# Altium PCB EVB-A32S1-M_PCB1.PcbDoc (part 1 of 2)
Units mm, origin at the board's own origin, x right, y up, seen from the top; angles counter-clockwise.
Board outline 152.4 x 101.6 mm, 4 copper layers (L1 (Signal), L2 (GND), L3 (PWR), L4 (Signal)), stack 1.553 mm thick; 111 components, 86 nets, 392 pads, 0 vias.
Unrouted connection lines stored in the file: 269.
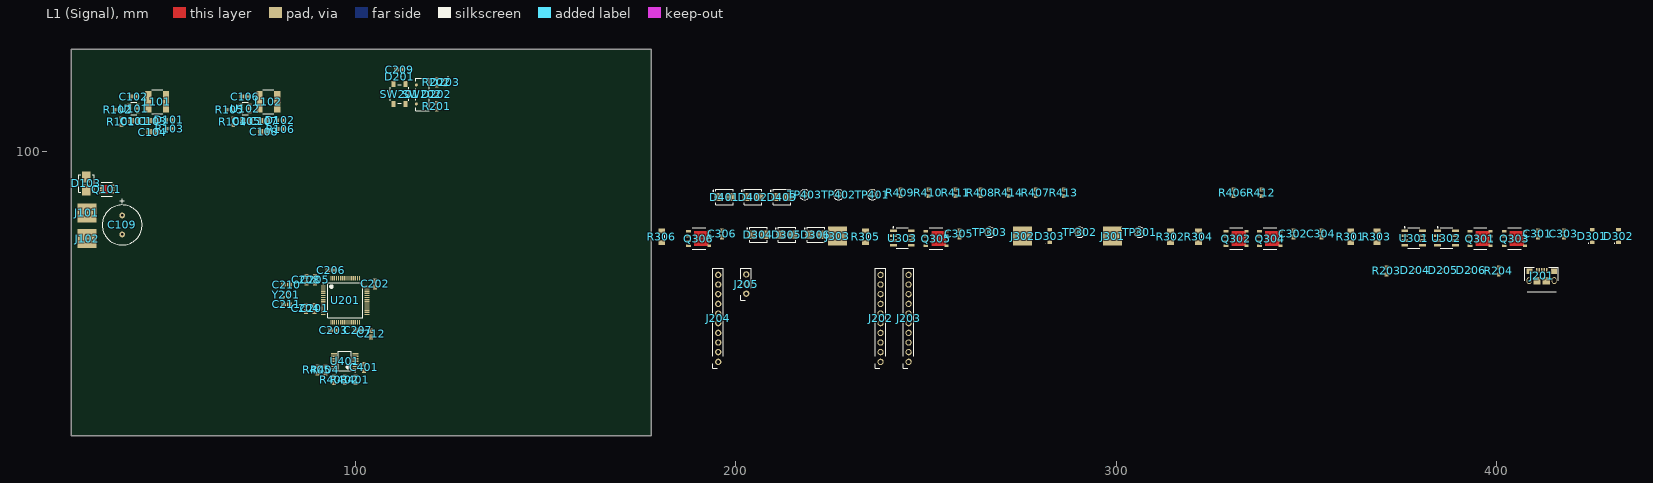
[diagram p0: L1 (Signal) view]
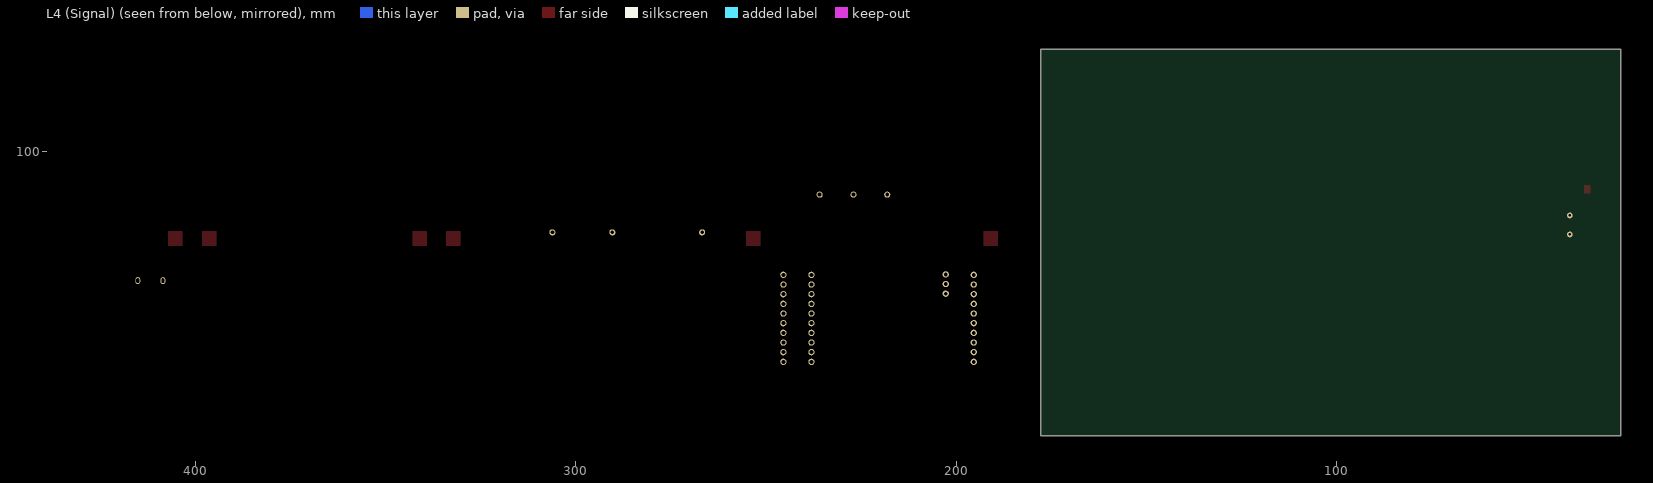
[diagram p1: L4 (Signal) view, seen from below]
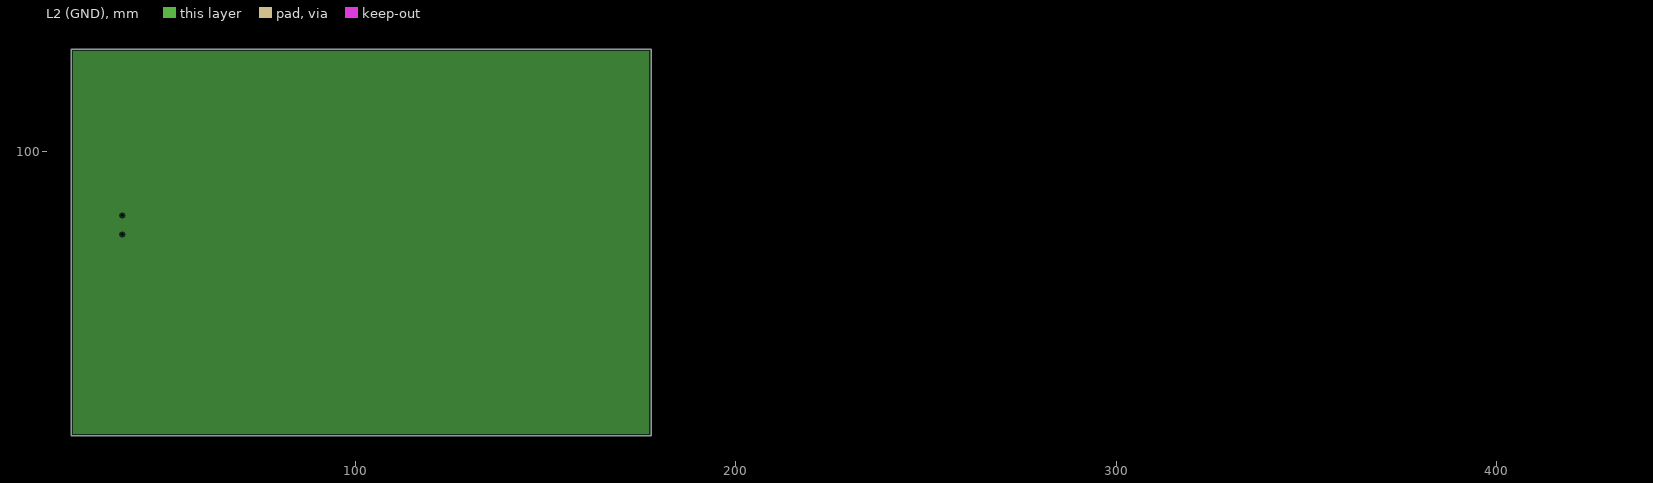
[diagram p2: L2 (GND), clearances drawn from the general rule]
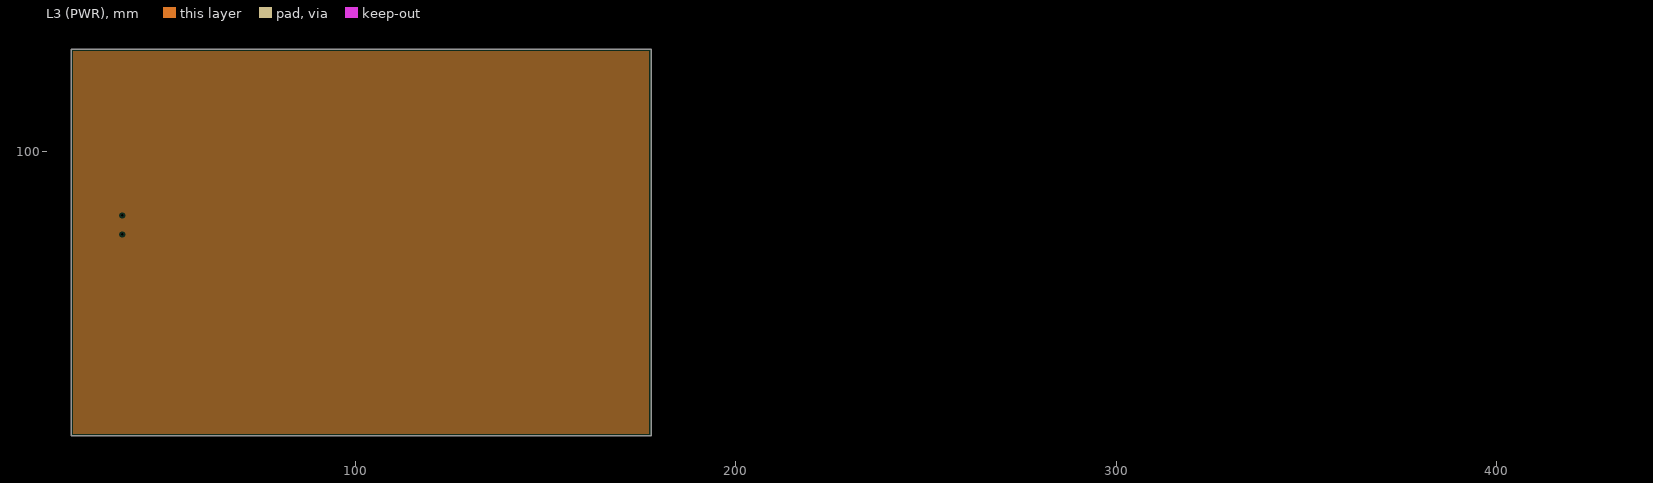
[diagram p3: L3 (PWR), clearances drawn from the general rule]

## Layer stack, top to bottom
Top Solder: solder mask 0.025, Peters Elpemer AS 2467 SM DG (Green), Dk 3.7
L1 (Signal): signal copper 0.04
PP1_1080: prepreg 0.0681, Panasonic 1080 / R-1551 (W), Dk 4.3
PP2_1080: prepreg 0.0681, Panasonic 1080 / R-1551 (W), Dk 4.3
L2 (GND): plane copper 0.035
C_FR4: core 1.13, Panasonic FR4 / R-1566(W), Dk 4.6
L3 (PWR): plane copper 0.035
PP3_1080: prepreg 0.0681, Panasonic 1080 / R-1551 (W), Dk 4.3
PP4_1080: prepreg 0.0681, Panasonic 1080 / R-1551 (W), Dk 4.3
L4 (Signal): signal copper 0.04
Bottom Solder: solder mask 0.025, Peters Elpemer AS 2467 SM DG (Green), Dk 3.7

## Board outline
25.4,25.4 177.8,25.4 177.8,127 25.4,127

## Design rules (kind name [scope] priority, off if disabled: settings)
BoardOutlineClearance CopperBoardOutlineClearance [IsText = 'False'] p1: gap=0.305 ignorepadtopadclearanceinfootprint=FALSE
BoardOutlineClearance SilkscreenBoardOutlineClearance [IsText = 'True'] p2: gap=0.4 ignorepadtopadclearanceinfootprint=FALSE
Clearance [All] p1: gap=0.3 ignorepadtopadclearanceinfootprint=FALSE except(0.125: Arc-Arc Arc-Track Arc-SMDPad Arc-Text Track-Track Track-SMDPad Track-Text SMDPad-SMDPad SMDPad-Fill SMDPad-Poly SMDPad-Region SMDPad-Text THPad-Text Via-Text Fill-Fill Fill-Poly Fill-Region Fill-Text Poly-Poly Poly-Region Poly-Text Region-Region Region-Text Text-Text Text-Hole)
DiffPairsRouting DiffUSBRouting [InDifferentialPairClass('DIFF_USB')] p1: maxlimit=0.165 minlimit=0.165 mostfreqgap=0.165 toplayer_minwidth=0.23 toplayer_maxwidth=0.23 toplayer_prefwidth=0.23 bottomlayer_minwidth=0.23 bottomlayer_maxwidth=0.23 bottomlayer_prefwidth=0.23 impedanceprofiledriven=TRUE impedanceprofileid={EB924580-F86E-4C7B-B4A8-C74598C83071} impedanceprofilevalue=90.000000 maxuncoupledlength=12.7
HoleSize NPTHSlotSize [HoleType = 'Slot' && PadIsPlated = 'False'] p1: absolutevalues=TRUE maxlimit=5.6 minlimit=1.8 maxpercent=80.000 minpercent=20.000
HoleSize PTHSlotSize [HoleType = 'Slot' && PadIsPlated = 'True'] p2: absolutevalues=TRUE maxlimit=2.6 minlimit=0.7 maxpercent=80.000 minpercent=20.000
HoleSize PTHSize [PadIsPlated = 'True'] p3: absolutevalues=TRUE maxlimit=5.6 minlimit=0.5 maxpercent=80.000 minpercent=20.000
HoleSize NPTHSize [PadIsPlated = 'False'] p4: absolutevalues=TRUE maxlimit=5.6 minlimit=0.5 maxpercent=80.000 minpercent=20.000
HoleToHoleClearance [All] p1: gap=0.3 allowstackedmicrovias=TRUE
MinimumAnnularRing PTHSlotMinimumAnnularRing [HoleType = 'Slot' && PadIsPlated = 'True'] p1: minimumring=0.3
MinimumAnnularRing PTHMinimumAnnularRing [PadIsPlated = 'True'] p2: minimumring=0.3
MinimumAnnularRing ViaMinimumAnnularRing [IsVia] p3: minimumring=0.1
MinimumSolderMaskSliver [All] p1: minsoldermaskwidth=0.075
PlaneClearance [All] p1: clearance=0.508
PlaneConnect [All] p1: pad.planeconnectstyle=Relief pad.reliefexpansion=0.508 pad.reliefentries=4 pad.reliefconductorwidth=0.254 pad.reliefairgap=0.3 via.planeconnectstyle=Direct via.reliefexpansion=0.508 via.reliefentries=4 via.reliefconductorwidth=0.254 via.reliefairgap=0.254
PolygonConnect [All] p1: thpad.connectstyle=Relief thpad.reliefconductorwidth=0.254 thpad.reliefentries=4 thpad.polygonreliefangle="90 Angle" thpad.airgapwidth=0.3 smdpad.connectstyle=Relief smdpad.reliefconductorwidth=0.254 smdpad.reliefentries=4 smdpad.polygonreliefangle="90 Angle" smdpad.airgapwidth=0.3 via.connectstyle=Direct via.reliefconductorwidth=0.254 via.reliefentries=4 via.polygonreliefangle="90 Angle" via.airgapwidth=0.254
RoutingVias [All] p1: holewidth=0.3 width=0.7 viastyle="Through Hole" minholewidth=0.25 minwidth=0.5 maxholewidth=0.45 maxwidth=0.7
SilkToSilkClearance [All] p1: silktosilkclearance=0.3
SilkToSolderMaskClearance [IsPad] p1: minsilkscreentomaskgap=0.15 clearancetoexposedcopper=TRUE
SolderMaskExpansion [All] p1: expansion=0.127 istentingtop=FALSE
SupplyNets "Schematic Supply Nets_2" [InNet('+VBAT')] p1: voltage=0.000
SupplyNets "Schematic Supply Nets_4" [InNet('GND')] p2: voltage=0.000
SupplyNets "Schematic Supply Nets_3" [InNet('+VCC')] p3: voltage=0.000
SupplyNets "Schematic Supply Nets_1" [InNet('+5V')] p4: voltage=0.000
SupplyNets "Schematic Supply Nets" [InNet('+3V3')] p5: voltage=0.000
UnRoutedNet [All] p1: checkbadconnections=TRUE
Width [All] p1: maxlimit=1 minlimit=0.15 preferedwidth=0.25
21 further rules are at their usual default settings.

## Classes and differential pairs
differential pair class DIFF_USB: USB_D
component class 4_EVB-A32S1-M_Sensing: C401 D401 D402 D403 R401 R402 R403 R404 R405 R406 R407 R408 R409 R410 R411 R412 R413 R414 TP401 TP402 TP403 U401
component class 3_EVB-A32S1-M_Motor: C301 C302 C303 C304 C305 C306 D301 D302 D303 D304 D305 D306 J301 J302 J303 Q301 Q302 Q303 Q304 Q305 Q306 R301 R302 R303 R304 R305 R306 TP301 TP302 TP303 U301 U302 U303
component class 2_EVB-A32S1-M_MCU: C201 C202 C203 C204 C205 C206 C207 C208 C209 C210 C211 C212 D201 D202 D203 D204 D205 D206 J201 J202 J203 J204 J205 R201 R202 R203 R204 SW201 SW202 U201 Y201
component class 1_EVB-A32S1-M_Power: C101 C102 C103 C104 C105 C106 C107 C108 C109 D101 D102 D103 J101 J102 L101 L102 Q101 R101 R102 R103 R104 R105 R106 U101 U102
differential pair USB_D: +USB_D_P -USB_D_N

## Components (designator, comment, footprint, x,y, rotation, side; value= is the part's Value field where it differs from the comment)
C101 "CL21A106KOQNNNE" C_Samsung_CL_0805_A 42.1,108.1 r180 top value=10uF
C102 "CC0603KRX7R7BB104" C_Yageo_CC_0603_A 41.8,114.5 r180 top value=100nF
C103 "CC0805MKX5R6BB226" C_Yageo_CC_0805_A 46.9,108.1 r0 top value=22uF
C104 "CC0805MKX5R6BB226" C_Yageo_CC_0805_A 46.9,105.2 r0 top value=22uF
C105 "CL21A106KOQNNNE" C_Samsung_CL_0805_A 71.5,108.1 r180 top value=10uF
C106 "CC0603KRX7R7BB104" C_Yageo_CC_0603_A 71.1,114.5 r180 top value=100nF
C107 "CC0805MKX5R6BB226" C_Yageo_CC_0805_A 76.1,108.1 r0 top value=22uF
C108 "CC0805MKX5R6BB226" C_Yageo_CC_0805_A 76.1,105.3 r0 top value=22uF
C109 "35ZLH470MEFC10X16" C_Rubycon_10x16mm_TH 38.8,80.8 r270 top value=470uF
C201 "CC0603KRX7R7BB105" C_Yageo_CC_0603_A 89.4,58.9 r270 top value=1uF
C202 "CC0603KRX7R7BB104" C_Yageo_CC_0603_A 105.3,65.3 r90 top value=100nF
C203 "CC0603KRX7R7BB104" C_Yageo_CC_0603_A 94.4,53.1 r0 top value=100nF
C204 "CC0603KRX7R7BB104" C_Yageo_CC_0603_A 87.1,58.9 r270 top value=100nF
C205 "CC0603KRX7R7BB104" C_Yageo_CC_0603_A 89.5,66.4 r270 top value=100nF
C206 "CC0603KRX7R7BB104" C_Yageo_CC_0603_A 93.7,68.9 r180 top value=100nF
C207 "CC0603KRX7R7BB104" C_Yageo_CC_0603_A 100.9,53.1 r0 top value=100nF
C208 "CC0603KRX5R7BB475" C_Yageo_CC_0603_A 87.2,66.4 r270 top value=4.7uF
C209 "CC0603KRX7R7BB104" C_Yageo_CC_0603_A 111.7,121.6 r180 top value=100nF
C210 "CC0603JRNPO9BN150" C_Yageo_CC_0603_A 82,65.1 r180 top value=15pF
C211 "CC0603JRNPO9BN150" C_Yageo_CC_0603_A 82,59.9 r0 top value=15pF
C212 "CC0603KRX5R7BB475" C_Yageo_CC_0603_A 104.2,52.2 r90 top value=4.7uF
C301 "CC0603KRX7R7BB105" C_Yageo_CC_0603_A 410.845,78.486 r90 top value=1uF
C302 "CC0603KRX7R7BB105" C_Yageo_CC_0603_A 346.583,78.486 r90 top value=1uF
C303 "CC0603KRX7R7BB105" C_Yageo_CC_0603_A 417.703,78.486 r90 top value=1uF
C304 "CC0603KRX7R7BB105" C_Yageo_CC_0603_A 353.949,78.486 r90 top value=1uF
C305 "CC0603KRX7R7BB105" C_Yageo_CC_0603_A 258.826,78.486 r90 top value=1uF
C306 "CC0603KRX7R7BB105" C_Yageo_CC_0603_A 196.469,78.486 r90 top value=1uF
C401 "CC0603KRX7R7BB104" C_Yageo_CC_0603_A 102.4,43.4 r90 top value=100nF
D101 "LTST-C190GKT" D_LED_Lite-On_Green_0603_A 51.2,108.4 r180 top
D102 "LTST-C190GKT" D_LED_Lite-On_Green_0603_A 80.4,108.3 r180 top
D103 "SMBJ15CA-13-F" D_TVS_BI_Diodes_SMBJ15CA-13-F_A 29.4,91.7 r90 top value=280pF
D201 "D5V0F1U2S9-7" D_TVS_Uni_Diodes_SOD-923_B 111.7,119.8 r0 top value=5E-13F
D202 "D5V0F1U2S9-7" D_TVS_Uni_Diodes_SOD-923_B 121.5,115.1 r90 top value=5E-13F
D203 "LTST-C190GKT" D_LED_Lite-On_Green_0603_A 123.7,118.3 r270 top
D204 "D5V0F1U2S9-7" D_TVS_Uni_Diodes_SOD-923_B 378.587,68.834 r90 top value=5E-13F
D205 "D5V0F1U2S9-7" D_TVS_Uni_Diodes_SOD-923_B 385.953,68.834 r90 top value=5E-13F
D206 "D5V0F1U2S9-7" D_TVS_Uni_Diodes_SOD-923_B 393.319,68.834 r90 top value=5E-13F
D301 "B5819W-TP" D_Schottky_MCC_SOD-123 425.196,77.851 r90 top
D302 "B5819W-TP" D_Schottky_MCC_SOD-123 432.054,77.851 r90 top
D303 "B5819W-TP" D_Schottky_MCC_SOD-123 282.575,77.851 r90 top
D304 "SMBJ15A-13-F" D_TVS_Uni_Diodes_DO-214AA_B 205.994,78.232 r0 top value=800pF
D305 "SMBJ15A-13-F" D_TVS_Uni_Diodes_DO-214AA_B 213.487,78.232 r0 top value=800pF
D306 "SMBJ15A-13-F" D_TVS_Uni_Diodes_DO-214AA_B 221.107,78.232 r0 top value=800pF
D401 "SMBJ15A-13-F" D_TVS_Uni_Diodes_DO-214AA_B 197.104,88.138 r0 top value=800pF
D402 "SMBJ15A-13-F" D_TVS_Uni_Diodes_DO-214AA_B 204.597,88.138 r0 top value=800pF
D403 "SMBJ15A-13-F" D_TVS_Uni_Diodes_DO-214AA_B 212.217,88.138 r0 top value=800pF
J101 "Solder_Pad_Conn" Solder_Pad_Conn-Footprint-1 29.5,84 r90 top
J102 "Solder_Pad_Conn" Solder_Pad_Conn-Footprint-1 29.6,77.2 r90 top
J201 "10118193-0001LF" J_USB_Micro-B_Amphenol_10118193-0001LF 411.861,66.167 r0 top
J202 "PPPC101LFBN-RC" J_Sullins_01x07_Socket_2.54mm 238.125,56.261 r90 top
J203 "PPPC101LFBN-RC" J_Sullins_01x07_Socket_2.54mm 245.491,56.261 r90 top
J204 "PPPC101LFBN-RC" J_Sullins_01x07_Socket_2.54mm 195.453,56.261 r90 top
J205 "PPPC031LFBN-RC" J_Sullins_01x03_Socket_2.54mm 202.819,65.278 r90 top
J301 "Solder_Pad_Conn" Solder_Pad_Conn-Footprint-1 299.085,77.851 r90 top
J302 "Solder_Pad_Conn" Solder_Pad_Conn-Footprint-1 275.463,77.851 r90 top
J303 "Solder_Pad_Conn" Solder_Pad_Conn-Footprint-1 226.822,77.851 r90 top
L101 "1255AY-3R9N=P3" L_Murata_1255AY-XXXX=P3 48,113.2 r0 top value=3.9uH
L102 "1255AY-4R7M=P3" L_Murata_1255AY-XXXX=P3 77.2,113.2 r0 top value=4.7uH
Q101 "SI7617DN-T1-GE3" Q_Vishay_PowerPACK-1212-8 34.8,90.2 r180 top
Q301 "SIR182DP-T1-RE3" Q_Vishay_PowerPACK-SO-8-Single 395.478,77.216 r0 top
Q302 "SIR182DP-T1-RE3" Q_Vishay_PowerPACK-SO-8-Single 331.343,77.216 r0 top
Q303 "SIR182DP-T1-RE3" Q_Vishay_PowerPACK-SO-8-Single 404.495,77.216 r0 top
Q304 "SIR182DP-T1-RE3" Q_Vishay_PowerPACK-SO-8-Single 340.233,77.216 r0 top
Q305 "SIR182DP-T1-RE3" Q_Vishay_PowerPACK-SO-8-Single 252.476,77.216 r0 top
Q306 "SIR182DP-T1-RE3" Q_Vishay_PowerPACK-SO-8-Single 190.119,77.216 r0 top
R101 "RC0603FR-07110KL" R_Yageo_RCL_0603_A 38.6,107.9 r270 top value=110kR
R102 "RC0603FR-0713KL" R_Yageo_RCL_0603_A 37.7,111.1 r0 top value=13kR
R103 "RC0603FR-071KL" R_Yageo_RCL_0603_A 51.3,106.1 r0 top value=1kR
R104 "RC0603FR-07110KL" R_Yageo_RCL_0603_A 68,107.9 r270 top value=110kR
R105 "RC0603FR-0713KL" R_Yageo_RCL_0603_A 67.1,111.1 r0 top value=13kR
R106 "RC0603FR-071KL" R_Yageo_RCL_0603_A 80.5,106 r0 top value=1kR
R201 "RC0603FR-0710KL" R_Yageo_RCL_0603_A 121.5,112 r270 top value=10kR
R202 "RC0603FR-071KL" R_Yageo_RCL_0603_A 121.5,118.3 r90 top value=1kR
R203 "RC0603FR-1333KL" R_Yageo_RCL_0603_A 371.094,68.707 r90 top value=33kR
R204 "RC0603FR-0713KL" R_Yageo_RCL_0603_A 400.558,68.707 r90 top value=13kR
R301 "RC1206FR-07100RL" R_Yageo_RCL_1206_A 361.696,77.724 r90 top value=100R
R302 "RC1206FR-07100RL" R_Yageo_RCL_1206_A 314.325,77.724 r90 top value=100R
R303 "RC1206FR-07100RL" R_Yageo_RCL_1206_A 368.554,77.724 r90 top value=100R
R304 "RC1206FR-07100RL" R_Yageo_RCL_1206_A 321.691,77.724 r90 top value=100R
R305 "RC1206FR-07100RL" R_Yageo_RCL_1206_A 234.188,77.724 r90 top value=100R
R306 "RC1206FR-07100RL" R_Yageo_RCL_1206_A 180.594,77.724 r90 top value=100R
R401 "RC0603FR-0710KL" R_Yageo_RCL_0603_A 100.1,40.1 r270 top value=10kR
R402 "RC0603FR-0710KL" R_Yageo_RCL_0603_A 97.3,40.1 r270 top value=10kR
R403 "RC0603FR-0710KL" R_Yageo_RCL_0603_A 94.5,40.1 r270 top value=10kR
R404 "RC0603FR-0710KL" R_Yageo_RCL_0603_A 92.2,42.7 r90 top value=10kR
R405 "RC0603FR-0710KL" R_Yageo_RCL_0603_A 90.1,42.7 r90 top value=10kR
R406 "RC0603FR-1333KL" R_Yageo_RCL_0603_A 330.835,89.281 r90 top value=33kR
R407 "RC0603FR-1333KL" R_Yageo_RCL_0603_A 278.892,89.281 r90 top value=33kR
R408 "RC0603FR-1333KL" R_Yageo_RCL_0603_A 264.414,89.281 r90 top value=33kR
R409 "RC0603FR-0710KL" R_Yageo_RCL_0603_A 243.332,89.281 r90 top value=10kR
R410 "RC0603FR-0710KL" R_Yageo_RCL_0603_A 250.698,89.281 r90 top value=10kR
R411 "RC0603FR-0710KL" R_Yageo_RCL_0603_A 257.81,89.281 r90 top value=10kR
R412 "RC0603FR-1333KL" R_Yageo_RCL_0603_A 338.201,89.281 r90 top value=33kR
R413 "RC0603FR-1333KL" R_Yageo_RCL_0603_A 286.258,89.281 r90 top value=33kR
R414 "RC0603FR-1333KL" R_Yageo_RCL_0603_A 271.78,89.281 r90 top value=33kR
SW201 "PTS647SN50SMTR2LFS" SW_Tactitle_SPST_C&K_PTS647SN50SMTR2LFS 111.7,115.2 r90 top
SW202 "JS102011JCQN" SW_Slide_C&K_JS102011JCQN 117.7,115.1 r270 top
TP301 "5001" TP_Keystone_TH 306.197,78.867 r90 top
TP302 "5001" TP_Keystone_TH 290.449,78.867 r90 top
TP303 "5001" TP_Keystone_TH 266.827,78.867 r90 top
TP401 "5001" TP_Keystone_TH 235.966,88.773 r90 top
TP402 "5001" TP_Keystone_TH 227.076,88.773 r90 top
TP403 "5001" TP_Keystone_TH 218.186,88.773 r90 top
U101 "AP63203WU-7" U_Diodes_AP623xx 41.8,111.4 r270 top
U102 "AP63205WU-7" U_Diodes_AP623xx 71.2,111.4 r270 top
U201 "STM32F401RET6" U_ST_STM32F401xD/xE_B 97.4,61 r0 top
U301 "IR2103STRPBF" U_Infineon_8-SOIC_3.9mm 378.206,77.343 r0 top
U302 "IR2103STRPBF" U_Infineon_8-SOIC_3.9mm 386.842,77.343 r0 top
U303 "IR2103STRPBF" U_Infineon_8-SOIC_3.9mm 243.84,77.343 r0 top
U401 "LM339APWR" U_TI_14-TSSOP-5.00x4.40mm_0.62mm_B 97.3,45 r180 top
Y201 "ECS-240-12-37B-CKY-TR" Y_Crystal_GND24_ECS_240-12-37B-CKY-TR 81.9,62.5 r270 top

## Footprints (in the part's own frame and the unit in brackets; to place one, negate y for a bottom-side part, rotate by r counter-clockwise, add the part's x,y. Pads: shape width x height; smd on the part's side, far side on the other; paste and mask are expansions set on the pad)
C_Rubycon_10x16mm_TH [mm]
  round 1.5 hole 0.65: 1(-2.5,0) 2(2.5,0)
  silkscreen extent -6.9,-5.25 5.25,5.25, body extent -5.11,-5.1 5.11,5.1, height 16.46
C_Samsung_CL_0805_A [mm] "Chip Capacitor, 2-Leads, Body 2.00x1.25mm, IPC Low Density"
  rect 1.45x1.55 smd: 1(-0.95,0) 2(0.95,0)
  body extent -1.07,-0.7 1.07,0.7, height 1.4
C_Yageo_CC_0603_A [mm] "Yageo series CC Chip Capacitor, 2-Leads, Body 1.60x0.80mm, IPC Low Density"
  rect 1.3x1.05 smd mask+0.05: 1(-0.8,0) 2(0.8,0)
  body extent -0.9,-0.5 0.9,0.5, height 1
C_Yageo_CC_0805_A [mm] "Yageo series CC Chip Capacitor, 2-Leads, Body 2.00x1.25mm, IPC Low Density"
  rect 1.5x1.55 smd mask+0.05: 1(-0.9,0) 2(0.9,0)
  body extent -1.1,-0.72 1.1,0.72, height 1.45
D_LED_Lite-On_Green_0603_A [mm] "Chip Diode, 2-Leads, Body 1.60x0.70mm, IPC Low Density"
  rect 0.85x0.95 smd: 1(-0.75,0) 2(0.75,0)
  silkscreen extent -1.44,0.64 -1.34,0.74, body extent -0.8,-0.4 0.8,0.4, height 0.8
D_Schottky_MCC_SOD-123 [mm]
  rect 0.91x1.22 smd: 1(-1.635,0) 2(1.635,0)
  silkscreen extent -1.89,1.01 -1.81,1.09, body extent -1.83,-0.85 1.88,0.85, height 1.21
D_TVS_BI_Diodes_SMBJ15CA-13-F_A [mm] "Molded Diode, 2-Leads, Body 4.31x3.62mm, IPC Low Density"
  rect 2.85x2.25 smd: 1(-1.675,0) 2(1.675,0)
  silkscreen extent -2.3,-2 2.3,2, body extent -2.5,-1.97 2.5,1.97, height 2.44
D_TVS_Uni_Diodes_DO-214AA_B [mm] "Molded Diode, 2-Leads, Body 4.31x3.62mm, IPC Medium Density"
  rect 2.45x2.15 smd: 1(-1.575,0) 2(1.575,0)
  silkscreen extent -3.07,-2 2.3,2, body extent -2.5,-1.97 2.5,1.97, height 2.5
D_TVS_Uni_Diodes_SOD-923_B [mm] "SODFL, 2-Leads, Body 0.60x1.00mm, IPC Medium Density"
  rect 0.4x0.6 smd: 1(-0.45,0) 2(0.45,0)
  silkscreen extent -0.6,0.55 -0.5,0.65, body extent -0.5,-0.33 0.5,0.33, height 0.4
J_Sullins_01x03_Socket_2.54mm [mm]
  round 1.65 hole 1.02 mask+0.05: 1(-2.54,0) 2(0,0) 3(2.54,0)
  silkscreen extent -4.21,-1.3 4.19,1.4, body extent -4.06,-1.27 4.06,1.27, height 8.5
J_Sullins_01x07_Socket_2.54mm [mm]
  round 1.65 hole 1.02 mask+0.05: 1(-11.43,0) 2(-8.89,0) 3(-6.35,0) 4(-3.81,0) 5(-1.27,0) 6(1.27,0) 7(3.81,0) 8(6.35,0) 9(8.89,0) 10(11.43,0)
  silkscreen extent -13.1,-1.3 13.1,1.4, body extent -12.95,-1.27 12.95,1.27, height 8.5
J_USB_Micro-B_Amphenol_10118193-0001LF [mm] "USB - micro B USB 2.0 Receptacle Connector 5 Position Surface Mount, Right Angle; Through Hole"
  rect 0.4x1.35 smd mask+0.05: 1(-1.3,2.675) 2(-0.65,2.675) 3(0,2.675) 4(0.65,2.675) 5(1.3,2.675)
  rect 1.6x1.4 smd mask+0.05: 6(-3.2,2.45) 7(3.2,2.45)
  rect 1.9x1.9 smd mask+0.05: 8(1.2,0) 9(-1.2,0)
  oval 1.3x1.8 hole 0.7 slot 1.2 at 90 deg mask+0.05: 10(3.3,0) 11(-3.3,0)
  silkscreen extent -4.4,-2.9 4.4,3.5, body extent -3.93,-2.76 3.93,2.95, height 2.81
L_Murata_1255AY-XXXX=P3 [mm]
  rect 1.6x5.7 smd: 1(-2.35,0) 2(2.35,0)
  silkscreen extent -1.45,-3.2 1.45,3.2, body extent -3,-3 3,3, height 4.51
Q_Vishay_PowerPACK-1212-8 [mm]
  rect 0.99x0.405 smd mask+0.05: 1(-1.435,0.975) 2(-1.435,0.315) 3(-1.435,-0.345) 4(-1.435,-1.005)
  rect 0.76x0.405 smd mask+0.05: 5(1.55,-0.98) 6(1.55,-0.32) 7(1.55,0.34) 8(1.55,1)
  L1 (Signal) region: -0.307,-1.118 1.418,-1.118 1.418,1.117 -0.307,1.117
  silkscreen extent -1.4,-1.8 1.5,1.8, body extent -1.65,-1.65 1.65,1.65, height 1.13
Q_Vishay_PowerPACK-SO-8-Single [mm]
  rect 1.27x0.61 smd: 1(-2.485,1.905) 2(-2.485,0.635) 3(-2.485,-0.635) 4(-2.485,-1.905)
  rect 1.02x0.61 smd: 5(2.98,-1.905) 6(2.98,-0.635) 7(2.98,0.635) 8(2.98,1.905)
  L1 (Signal) region: -1.033,-1.955 2.777,-1.955 2.777,1.955 -1.033,1.955
  silkscreen extent -1.5,-2.8 2,2.8, body extent -2.92,-2.65 3.32,2.65, height 1.09
R_Yageo_RCL_0603_A [mm] "Yageo series RCL Chip Resistor, 2-Leads, Body 1.60x0.80mm, IPC Low Density"
  rect 1.05x1 smd: 1(-0.875,0) 2(0.875,0)
  body extent -0.85,-0.45 0.85,0.45, height 0.55
R_Yageo_RCL_1206_A [mm] "Yageo series RC_L Chip Resistor, 2-Leads, Body 3.10x1.60mm, IPC Low Density"
  rect 1.3x1.8 smd: 1(-1.5,0) 2(1.5,0)
  silkscreen extent -0.45,-0.8 0.45,0.8, body extent -1.6,-0.85 1.6,0.85, height 0.65
Solder_Pad_Conn-Footprint-1 [mm]
  rect 5x5 smd: 1(0,0)
SW_Slide_C&K_JS102011JCQN [mm] "Slide Switch SPDT Surface Mount"
  round 0.8 smd mask+0.05: 1(-2.5,-1.6) 2(0,1.6) 3(2.5,-1.6)
  silkscreen extent -4.3,-1.8 4.3,1.8, body extent -4.25,-2 4.25,2, height 5.4
SW_Tactitle_SPST_C&K_PTS647SN50SMTR2LFS [mm] "Tactitle switch SPST-NO 4.5mm x 4.5mm"
  rect 1.55x1 smd mask+0.05: 1(-2.625,1.6) 2(2.625,1.6) 3(-2.625,-1.6) 4(2.625,-1.6)
  silkscreen extent -2.4,-2.4 2.4,2.4, body extent -3.25,-2.25 3.25,2.25, height 5
TP_Keystone_TH [mm]
  round 1.6 hole 1: 1(0,0)
  silkscreen extent -1.35,-1.35 1.35,1.35, body extent -1.27,-1.26 1.27,1.26, height 4.57
U_Diodes_AP623xx [mm]
  rect 0.7x1 smd mask+0.05: 1(-0.95,-1.1) 2(0,-1.1) 3(0.95,-1.1) 4(0.95,1.1) 5(0,1.1) 6(-0.95,1.1)
  silkscreen extent -1.6,-2.01 1.6,0.8, body extent -1.45,-1.45 1.45,1.45, height 0.91
U_Infineon_8-SOIC_3.9mm [mm] "SOIC, 8-Leads, Body 4.90x3.90mm, Pitch 1.27mm, IPC Medium Density"
  rect 1.78x0.72 smd: 1(-2.34,1.905) 2(-2.34,0.635) 3(-2.34,-0.635) 4(-2.34,-1.905) 5(2.34,-1.905) 6(2.34,-0.635) 7(2.34,0.635) 8(2.34,1.905)
  silkscreen extent -2.46,-2.7 1.6,2.94, body extent -3,-2.5 3,2.5, height 1.75
U_ST_STM32F401xD/xE_B [mm] "TSQFP, 64-Leads, Body 10.00x10.00mm, Pitch 0.50mm, IPC Medium Density"
  rect 1.2x0.3 smd mask+0.05: 1(-5.75,3.75) 2(-5.75,3.25) 3(-5.75,2.75) 4(-5.75,2.25) 5(-5.75,1.75) 6(-5.75,1.25) 7(-5.75,0.75) 8(-5.75,0.25) 9(-5.75,-0.25) 10(-5.75,-0.75) 11(-5.75,-1.25) 12(-5.75,-1.75) 13(-5.75,-2.25) 14(-5.75,-2.75) 15(-5.75,-3.25) 16(-5.75,-3.75) 33(5.75,-3.75) 34(5.75,-3.25) 35(5.75,-2.75) 36(5.75,-2.25) 37(5.75,-1.75) 38(5.75,-1.25) 39(5.75,-0.75) 40(5.75,-0.25) 41(5.75,0.25) 42(5.75,0.75) 43(5.75,1.25) 44(5.75,1.75) 45(5.75,2.25) 46(5.75,2.75) 47(5.75,3.25) 48(5.75,3.75)
  rect 0.3x1.2 smd mask+0.05: 17(-3.75,-5.75) 18(-3.25,-5.75) 19(-2.75,-5.75) 20(-2.25,-5.75) 21(-1.75,-5.75) 22(-1.25,-5.75) 23(-0.75,-5.75) 24(-0.25,-5.75) 25(0.25,-5.75) 26(0.75,-5.75) 27(1.25,-5.75) 28(1.75,-5.75) 29(2.25,-5.75) 30(2.75,-5.75) 31(3.25,-5.75) 32(3.75,-5.75) 49(3.75,5.75) 50(3.25,5.75) 51(2.75,5.75) 52(2.25,5.75) 53(1.75,5.75) 54(1.25,5.75) 55(0.75,5.75) 56(0.25,5.75) 57(-0.25,5.75) 58(-0.75,5.75) 59(-1.25,5.75) 60(-1.75,5.75) 61(-2.25,5.75) 62(-2.75,5.75) 63(-3.25,5.75) 64(-3.75,5.75)
  silkscreen extent -5.87,-4.6 4.6,4.6, body extent -6,-6 6,6, height 1.6
U_TI_14-TSSOP-5.00x4.40mm_0.62mm_B [mm] "TSOP, 14-Leads, Body 5.00x4.40mm, Pitch 0.65mm, IPC Medium Density"
  rect 1.6x0.35 smd mask+0.05: 1(-2.8,1.95) 2(-2.8,1.3) 3(-2.8,0.65) 4(-2.8,0) 5(-2.8,-0.65) 6(-2.8,-1.3) 7(-2.8,-1.95) 8(2.8,-1.95) 9(2.8,-1.3) 10(2.8,-0.65) 11(2.8,0) 12(2.8,0.65) 13(2.8,1.3) 14(2.8,1.95)
  silkscreen extent -2.93,-2.55 1.65,2.8, body extent -3.2,-2.55 3.2,2.55, height 1.2
Y_Crystal_GND24_ECS_240-12-37B-CKY-TR [mm]
  rect 0.65x0.55 smd mask+0.05: 1(-0.675,-0.525) 2(0.675,-0.525) 3(0.675,0.525) 4(-0.675,0.525)
  silkscreen extent -0.1,-0.9 0.1,0.9, body extent -1,-0.8 1,0.8, height 0.51

## Part data
C101 C105: library part CMP-001-00022-4, "Multilayer Ceramic Capacitor, 10 uF, 16 V, ± 10%, X5R, 0805 [2012 Metric]", Case Code (Imperial)=0805, Case Code (Metric)=2012, Dielectric=X7R, Max Operating Temperature=85°C, Min Operating Temperature=-55°C, Package Quantity=1, Tolerance=10%, Voltage=16V, Case/Package=0805, ComponentLink1Description=Datasheet, ComponentLink1URL=https://mm.digikey.com/Volume0/opasdata/d220001/medias/docus/609/CL21A106KOQNNNE_Spec.pdf, Construction=Flat, Depth=1.25mm, Height=1.25mm, Lead Free="Lead Free", Length=2mm, Material=Ceramic, Mounting Technology="Surface Mount", Packaging="Tape and Reel", Radiation Hardening=No, RoHS Compliant=Yes, Series=CL, Thickness=0.055inch, Voltage Rating=16V, Voltage Rating (DC)=16V, Width=0.049inch
C102 C106 C202 C203 C204 C205 C206 C207 C209 C401: library part CMP-001-00026-2, "Multilayer Ceramic Capacitor, 0.1 uF, 16 V, ± 10%, X7R, 0603 [1608 Metric]", Case Code (Imperial)=0603, Case Code (Metric)=1608, Dielectric=X7R, Insulation Resistance=100GR, Max Operating Temperature=125°C, Min Operating Temperature=-55°C, Package Quantity=1, Tolerance=10%, Voltage=16V, Case/Package=0603, ComponentLink1Description=Datasheet, ComponentLink1URL=https://www.yageo.com/upload/media/product/productsearch/datasheet/mlcc/UPY-GPHC_X7R_6.3V-to-250V_24.pdf, Depth=0.8mm, Halogen Free="Halogen Free", Height=0.8mm, Lead Free="Lead Free", Length=1.6mm, Material=Ceramic, Mounting Technology="Surface Mount", Packaging="Tape and Reel", Pins=2, Radiation Hardening=No, Reach SVHC Compliant=No, RoHS Compliant=Yes, Series=CC, Termination=SMD/SMT, Thickness=0.035inch, Voltage Rating=16V, Voltage Rating (DC)=16V, Width=0.031inch
C103 C104 C107 C108: library part CMP-001-00014-9, "Multilayer Ceramic Capacitor, 22 uF, 10 V, ± 20%, X5R, 0805 [2012 Metric]", Case Code (Imperial)=0805, Case Code (Metric)=2012, Dielectric=X5R, Max Operating Temperature=85°C, Min Operating Temperature=-55°C, Tolerance=20%, Voltage Rating=10V, Case/Package=0805, ComponentLink1Description=Datasheet, ComponentLink1URL=https://www.yageo.com/upload/media/product/app/datasheet/mlcc/upy-gphc_x5r_4v-to-50v.pdf, Depth=1.25mm, Halogen Free="Halogen Free", Lead Free="Lead Free", Length=2mm, Mounting Technology="Surface Mount", Packaging="Tape and Reel", Radiation Hardening=No, RoHS Compliant=Yes, Series=CC, Termination=SMD/SMT, Thickness=0.057inch, Voltage Rating (DC)=10V, Weight=0.000194oz, Width=0.049inch
C109: library part CMP-001-00025-6, "Cap Aluminum 470uF 35V 20% (10 X 16mm) Radial 5mm 1760mA 10000h 105 C Bulk", Case/Package=Radial, Dielectric Material=Aluminium, Leakage Current=3uA, Max Operating Temperature=105°C, Min Operating Temperature=-40°C, Ripple Current=1.76A, Tolerance=20%, Voltage=35V, ComponentLink1Description=Datasheet, ComponentLink1URL=https://www.rubycon.co.jp/wp-content/uploads/catalog-aluminum/ZLH.pdf, Construction=RADIAL, Diameter=10mm, Height=16mm, Impedance=28mR, Lead Diameter=0.6mm, Lead Free="Lead Free", Lead Pitch=5mm, Life (Hours)=10000Hour, Mounting Technology="Through Hole", Packaging=Bulk, Radiation Hardening=No, Reach SVHC Compliant=No, RoHS Compliant=Yes, Series=ZLH, Termination=Radial, Voltage Rating=35V, Voltage Rating (AC)=35V
C201 C301 C302 C303 C304 C305 C306: library part CMP-001-00019-5, "Multilayer Ceramic Capacitor, 1 uF, 16 V, ± 10%, X7R, 0603 [1608 Metric]", Case Code (Imperial)=0603, Case Code (Metric)=1608, Dielectric=X7R, Max Operating Temperature=125°C, Min Operating Temperature=-55°C, Package Quantity=1, Tolerance=10%, Voltage=16V, Case/Package=0603, ComponentLink1Description=Datasheet, ComponentLink1URL=https://www.yageo.com/upload/media/product/productsearch/datasheet/mlcc/UPY-GPHC_X7R_6.3V-to-250V_24.pdf, Construction=Flat, Depth=0.8mm, Dissipation Factor=5%, Halogen Free="Halogen Free", Height=0.8mm, Lead Free="Lead Free", Length=1.6mm, Material=Ceramic, Mounting Technology="Surface Mount", Packaging="Tape and Reel", Pins=2, Radiation Hardening=No, Reach SVHC Compliant=Unknown, RoHS Compliant=Yes, Series=CC, Termination=SMD/SMT, Thickness=0.035inch, Voltage Rating=16V, Voltage Rating (DC)=16V, Width=0.031inch
C208 C212: library part CMP-001-00027-2, "Multilayer Ceramic Capacitor, 4.7 uF, 16 V, ± 10%, X5R, 0603 [1608 Metric]", Case Code (Imperial)=0603, Case Code (Metric)=1608, Dielectric=X5R, Max Operating Temperature=85°C, Min Operating Temperature=-55°C, Tolerance=10%, Voltage Rating=16V, Case/Package=0603, ComponentLink1Description=Datasheet, ComponentLink1URL=https://www.yageo.com/upload/media/product/app/datasheet/mlcc/upy-gphc_x5r_4v-to-50v.pdf, Halogen Free="Halogen Free", Height=0.8mm, Lead Free="Lead Free", Length=1.6mm, Material=Ceramic, Mounting Technology="Surface Mount", Packaging="Tape and Reel", RoHS Compliant=Yes, Series=CC, Termination=SMD/SMT, Voltage Rating (DC)=16V, Weight=7.1E-05oz, Width=0.8mm
C210 C211: library part CMP-001-00028-2, "Multilayer Ceramic Capacitor, 15 pF, 50 V, ± 5%, C0G (NP0), 0603 [1608 Metric]", Case Code (Imperial)=0603, Case Code (Metric)=1608, Dielectric=C0G, Dielectric Material=Ceramic, Insulation Resistance=100GR, Max Operating Temperature=125°C, Min Operating Temperature=-55°C, Package Quantity=1, Tolerance=5%, Voltage Rating=50V, Case/Package=0603, ComponentLink1Description=Datasheet, ComponentLink1URL=https://www.yageo.com/upload/media/product/productsearch/datasheet/mlcc/UPY-GP_NP0_16V-to-50V_18.pdf, Depth=0.8mm, Height=0.8mm, Lead Free="Lead Free", Length=1.6mm, Mounting Technology="Surface Mount", Packaging="Tape and Reel", Pins=2, Radiation Hardening=No, Reach SVHC Compliant=No, RoHS Compliant=Yes, Series=CC, Termination=SMD/SMT, Thickness=0.035inch, Width=0.031inch
D101 D102 D203: library part CMP-007-00001-3, "LED Uni-Color Green 565nm 2-Pin Chip LED T/R", Case Code (Imperial)=0603, Case Code (Metric)=1608, Color=Green, Forward Current=30mA, Forward Voltage=2.1V, Lens Color=Colorless, Max Operating Temperature=85°C, Min Operating Temperature=-55°C, Package Quantity=1, Power Dissipation=100mW, Reverse Voltage=5V, Test Current=10mA, Voltage=2V, Case/Package=0603, ComponentLink1Description=Datasheet, ComponentLink1URL=https://mm.digikey.com/Volume0/opasdata/d220001/medias/docus/858/LTST-C190GKT.pdf, Depth=0.8mm, Dominant Wavelength=569nm, Height=0.9mm, Illumination Color=Green, Lead Free="Lead Free", Length=1.6mm, Lens Size=0.8mm, Lens Style=Flat,Diffused,Colorless,Rectangular,Clear, Lens Transparency=Clear, Luminous Intensity=6mcd, Mounting Technology="Surface Mount", Number of Elements=1, Number of LEDs=1, Packaging="Tape and Reel", Pins=2, Power Rating=100mW, Radiation Hardening=No, RoHS Compliant=Yes, Series=-, Viewing Angle=130°, Wavelength=565nm, Width=0.8mm
D103: library part CMP-004-00000-11, "Tvs Diode, Bidir, 15V, 600W, Do-214Aa Rohs Compliant: Yes", Breakdown Voltage=19.2V, Case/Package=SMB, Clamping Voltage=24.4V, Leakage Current=5uA, Max Operating Temperature=150°C, Max Output current=24A, Max Power Dissipation=600W, Min Breakdown Voltage=16.7V, Min Operating Temperature=-55°C, Package Quantity=3000, Power Line Protection=No, Reverse Standoff Voltage=15V, Test Current=1mA, Clamping Voltage-Max=24.4V, ComponentLink1Description=Datasheet, ComponentLink1URL=https://www.bourns.com/docs/Product-Datasheets/SMBJ.pdf, Diode Type=ZENER, Direction=Bidirectional, Height=2.62mm, Lead Free="Lead Free", Length=4.57mm, Max Breakdown Voltage=19.2V, Max Reverse Leakage Current=5uA, Max Surge Current=24A, Mounting Technology="Surface Mount", Number of Bidirectional Channels=1, Number of Elements=1, Packaging="Tape and Reel", Peak Pulse Current=24A, Peak Pulse Power=600W, Pins=2, Polarity=Bidirectional, Power Dissipation=600W, Radiation Hardening=No, Reverse Breakdown Voltage=16.7V, RoHS Compliant=Yes, Series=SMBJ, Termination=SMD/SMT, Voltage Rating (DC)=15V, Width=3.9mm, Working Voltage=15V
D201 D202 D204 D205 D206: library part CMP-004-00007-1, "Diode TVS Dual Uni-Dir 5.5V 250000W 2-Pin SOD-923 T/R", Breakdown Voltage=6V, Case/Package=SOD-923-2, Clamping Voltage=10V, Max Operating Temperature=150°C, Max Power Dissipation=250mW, Max Reverse Leakage Current=100nA, Max Surge Current=1.5A, Min Operating Temperature=-65°C, Package Quantity=10000, Peak Pulse Power=250kW, Power Line Protection=Yes, Reverse Standoff Voltage=5.5V, ComponentLink1Description=Datasheet, ComponentLink1URL=https://www.diodes.com/assets/Datasheets/D5V0F1U2S9.pdf, Contact Plating=Tin,Matte, Diode Type=ZENER, Direction=Unidirectional, ESD Protection=Yes, Min Breakdown Voltage=6V, Mounting Technology="Surface Mount", Number of Unidirectional Channels=1, Packaging="Tape and Reel", Peak Pulse Current=1.5A, Polarity=Unidirectional, RoHS Compliant=Yes, Series=-, Termination=SMD/SMT, Working Voltage=5.5V
D301 D302 D303: library part CMP-000001-2, "Rectifier Diode, Schottky, 1 Phase, 1 Element, 1A, 40V V(RRM), Silicon", Average Rectified Current=1A, Forward Voltage=550mV, Max Forward Surge Current (Ifsm)=10A, Max Operating Temperature=125°C, Max Power Dissipation=250mW, Max Repetitive Reverse Voltage (Vrrm)=40V, Max Reverse Current=1mA, Max Reverse Voltage (DC)=20V, Min Operating Temperature=-65°C, Package Quantity=3000, ComponentLink1Description=Datasheet, ComponentLink1URL=https://www.mccsemi.com/pdf/Products/B5817W-B5819W(SOD-123).pdf, Forward Current=1A, Mounting Technology="Surface Mount", Packaging="Tape and Reel", Reverse Voltage (DC)=40V, RoHS Compliant=Yes, Series=-
D304 D305 D306 D401 D402 D403: library part CMP-004-00005-2, "TVS Diode Single Uni-Dir 15V 600W 2-Pin SMB T/R / TVS DIODE 15VWM 24.4VC SMB", Breakdown Voltage=19.2V, Case/Package=SMB, Clamping Voltage=24.4V, Forward Voltage=5V, Leakage Current=5uA, Max Operating Temperature=150°C, Max Output current=24A, Max Power Dissipation=600W, Min Breakdown Voltage=16.7V, Min Operating Temperature=-55°C, Package Quantity=3000, Power Line Protection=No, Reverse Standoff Voltage=15V, Test Current=1mA, Clamping Voltage-Max=24.4V, Diode Type=ZENER, Direction=Unidirectional, Height=2.62mm, Lead Free="Lead Free", Length=4.57mm, Max Breakdown Voltage=19.2V, Max Reverse Leakage Current=5uA, Max Surge Current=24A, Mounting Technology="Surface Mount", Number of Elements=1, Number of Unidirectional Channels=1, Packaging="Tape and Reel", Peak Pulse Current=24A, Peak Pulse Power=600W, Pins=2, Polarity=Unidirectional, Power Dissipation=600W, Radiation Hardening=No, Reverse Breakdown Voltage=16.7V, RoHS Compliant=Yes, Series=SMBJ, Termination=SMD/SMT, Voltage Rating (DC)=15V, Width=3.9mm, Working Voltage=15V
J101 J102 J301 J302 J303: library part CMP-002-00005-2, "Solder pad connector"
J201: library part CMP-002-00002-12, "Usb Connector, 5 Contact(S), Female, Right Angle, Surface Mount Terminal, Locking, Receptacle", Color=Black, Current Rating=1.8A, Flammability Rating="UL94 V-0", Insulation Resistance=1GR, Max Operating Temperature=85°C, Max Voltage Rating (AC)=100V, Min Operating Temperature=-55°C, Package Quantity=1200, ComponentLink1Description=Drawing, ComponentLink1URL=https://cdn.amphenol-cs.com/media/wysiwyg/files/drawing/10118193.pdf, ComponentLink2Description=Datasheet, ComponentLink2URL=https://cdn.amphenol-cs.com/media/wysiwyg/files/documentation/datasheet/inputoutput/io_usb_micro.pdf, Connector Type=USB,Receptacle, Contact Material=Nickel,Gold, Contact Plating=Gold, Depth=5.67mm, Features=Shielded, Gender=Female, Height=3mm, Housing Material=Polymer, Length=7.86mm, Mounting Technology="Surface Mount,Horizontal", Number of Contacts=5, Number of Ports=1, Orientation="Right Angle", Packaging="Tape and Reel", Pins=11, Pitch=650um, Radiation Hardening=No, Series=-, Termination=Solder, USB Standard="USB 2.0", Voltage Rating=100V
J202 J203 J204: library part CMP-002-00003-8, "10 Position Total Single Row 2.54 mm Pitch Straight Female Header", Color=Black, Current Rating=3A, Max Operating Temperature=105°C, Min Operating Temperature=-40°C, Package Quantity=1000, Voltage Rating=250V, ComponentLink1Description=Datasheet, ComponentLink1URL=https://mm.digikey.com/Volume0/opasdata/d220001/medias/docus/937/Female_Headers.100_DS.pdf, Connector Type=Header, Contact Material=Bronze,Nickel,Gold, Contact Plating=Gold, Contact Type="Female Socket", Height=8.5mm, Housing Material=Plastic, Lead Free="Lead Free", Length=25.9mm, Mounting Technology="Through Hole", Number of Contacts=10, Number of Positions=10, Number of Rows=1, Packaging=Bulk, Pitch=0.1inch, RoHS Compliant=Yes, Termination=Solder, Width=2.5mm
J205: library part CMP-002-00004-8, "3 Position Total Single Row 2.54 mm Pitch Straight Female Header", Flammability Rating="UL94 V-0", Insulation Color=Black, Max Operating Temperature=105°C, Min Operating Temperature=-40°C, Voltage Rating=250V, ComponentLink1Description=Datasheet, ComponentLink1URL=https://mm.digikey.com/Volume0/opasdata/d220001/medias/docus/937/Female_Headers.100_DS.pdf, Connector Type=Header, Contact Finish - Mating=GOLD, Contact Material=Bronze, Contact Shape=Square, Contact Type="Female Socket", Fastening Type=Pull, Height=8.5mm, Housing Material=Plastic, Insulation Material=Polyester, Lead Free="Lead Free", Length=8.12mm, Mounting Technology="Through Hole", Number of Positions=3, Number of Rows=1, Packaging=Tray, Pitch=2.54mm, RoHS Compliant=Yes, Series=-, Termination=Solder, Width=2.5mm
L101: library part CMP-006-00002-7, "Inductor Power Shielded Wirewound 3.9uH 30% 100KHz Ferrite 4.2A 0.0264Ohm DCR 2424 T/R", Case/Package=Nonstandard, Current Rating=4.2A, DC Resistance (DCR)=26.4mR, Max Operating Temperature=85°C, Min Operating Temperature=-40°C, Saturation Current=4.7A, Test Frequency=100kHz, Tolerance=30%, ComponentLink1Description=Datasheet, ComponentLink1URL=https://search.murata.co.jp/Ceramy/image/img/P02/J(E)TE243B-0037_DG6045C_reference.pdf, Core Material=Ferrite, Height - Seated (Max)=0.177inch, Length=0.248inch, Mounting Technology="Surface Mount", Packaging="Cut Tape", RoHS Compliant=Yes, Series=-, Shielding=Shielded, Width=0.248inch
L102: library part CMP-006-00001-10, "Inductor Power Shielded Wirewound 4.7uH 20% 100KHz Ferrite 4A 0.0276Ohm DCR 2424 T/R", Case/Package=Nonstandard, Current Rating=4.5A, DC Resistance (DCR)=27.6mR, Inductance Tolerance=20%, Max DC Current=4A, Max Operating Temperature=85°C, Min Operating Temperature=-40°C, Test Frequency=100kHz, ComponentLink1Description=Datasheet, ComponentLink1URL=https://search.murata.co.jp/Ceramy/image/img/P02/J(E)TE243B-0037_DG6045C_reference.pdf, Core Material=Ferrite, ESR=27.6mR, Height=4.5mm, Height - Seated (Max)=0.177inch, Length=0.248inch, Mounting Technology="Surface Mount", Packaging="Cut Tape", RMS Current (Irms)=4A, RoHS Compliant=Yes, Saturation Current=4.5A, Series=DG6045C, Shielding=Shielded, Tolerance=20%, Width=0.248inch
Q101: library part CMP-00000-19, "P CHANNEL MOSFET, -30V, 35A; Transistor; Transistor Polarity: P Channel; Continuous Drain Current Id: -35A; Source", Continuous Drain Current (ID)=-35A, Drain to Source Breakdown Voltage=-30V, Drain to Source Resistance=12.3mR, Gate to Source Voltage (Vgs)=25V, Input Capacitance=1.8nF, Max Operating Temperature=150°C, Max Power Dissipation=52W, Min Operating Temperature=-55°C, Package Quantity=3000, Power Dissipation=3.7W, Threshold Voltage=-2.5V, ComponentLink1Description=Datasheet, ComponentLink1URL=https://www.vishay.com/docs/65164/si7617dn.pdf, Drain to Source Voltage (Vdss)=-30V, Fall Time=11ns, Height=1.12mm, Lead Free="Lead Free", Mounting Technology="Surface Mount", Number of Channels=1, Number of Elements=1, Packaging="Tape and Reel", Pins=8, Polarity=P-CHANNEL, Radiation Hardening=No, Rds On Max=12.3mR, Reach SVHC Compliant=No, Rise Time=43ns, RoHS Compliant=Yes, Series=TrenchFET®, Turn-Off Delay Time=30ns, Turn-On Delay Time=40ns
Q301 Q302 Q303 Q304 Q305 Q306: library part CMP-013-00000-7, "TrenchFET Gen IV Power MOSFET N-Channel Single 60V VDS ±20V VGS 60A ID 8-Pin PowerPAK SOIC T/R", Continuous Drain Current (ID)=60A, Drain to Source Voltage (Vdss)=60V, Input Capacitance=3.25nF, Max Operating Temperature=150°C, Max Power Dissipation=69.4W, Min Operating Temperature=-55°C, ComponentLink1Description=Datasheet, ComponentLink1URL=https://www.vishay.com/docs/77800/sir182dp.pdf, Mounting Technology="Surface Mount", Packaging="Cut Tape", Rds On Max=2.8mR, Series="TrenchFET® Gen IV"
R101 R104: library part CMP-009-00007-1, "SMD Chip Resistor, 110 kOhm, ± 1%, 100 mW, 0603 [1608 Metric], Thick Film, General Purpose", Case Code (Imperial)=0603, Case Code (Metric)=1608, Max Operating Temperature=155°C, Max Power Dissipation=100mW, Min Operating Temperature=-55°C, Temperature Coefficient=100ppm/°C, Tolerance=1%, Voltage Rating=50V, Case/Package=0603, ComponentLink1Description=Datasheet, ComponentLink1URL=https://www.yageo.com/upload/media/product/products/datasheet/rchip/PYu-RC_Group_51_RoHS_L_12.pdf, Construction=Rectangular, Depth=0.8mm, Features="Moisture Resistant", Height=0.45mm, Lead Free="Lead Free", Length=1.6mm, Military Standard=Not, Mounting Technology="Surface Mount", Number of Terminations=2, Packaging="Tape and Reel", Power Rating=100mW, RoHS Compliant=Yes, Series=RC, Technology="THICK FILM", Termination=SMD/SMT, Voltage Rating (DC)=50V
R102 R105 R204: library part CMP-009-00008-1, "SMD Chip Resistor, 13 kOhm, ± 1%, 100 mW, 0603 [1608 Metric], Thick Film, General Purpose", Case Code (Imperial)=0603, Case Code (Metric)=1608, Max Operating Temperature=155°C, Max Power Dissipation=100mW, Min Operating Temperature=-55°C, Resistance Tolerance=1%, Resistor Type="Thick Film", Temperature Coefficient=100ppm/°C, Voltage Rating=50V, Case/Package=0603, ComponentLink1Description=Datasheet, ComponentLink1URL=https://www.yageo.com/upload/media/product/products/datasheet/rchip/PYu-RC_Group_51_RoHS_L_12.pdf, Construction=Rectangular, Depth=0.8mm, Features="Moisture Resistant", Lead Free="Lead Free", Length=1.6mm, Military Standard=Not, Number of Terminations=2, Packaging="Tape and Reel", Pins=2, Power Rating=100mW, Reach SVHC Compliant=No, RoHS Compliant=Yes, Series=RC, Termination=SMD/SMT, Tolerance=1%, Voltage Rating (DC)=50V
R103 R106 R202: library part CMP-009-00009-1, "SMD Chip Resistor, 1 kOhm, ± 1%, 100 mW, 0603 [1608 Metric], Thick Film, General Purpose", Case Code (Imperial)=0603, Case Code (Metric)=1608, Max Operating Temperature=155°C, Max Power Dissipation=100mW, Min Operating Temperature=-55°C, Resistance Tolerance=1%, Resistor Type="Thick Film", Temperature Coefficient=100ppm/°C, Voltage Rating=50V, Case/Package=0603, ComponentLink1Description=Datasheet, ComponentLink1URL=https://www.yageo.com/upload/media/product/products/datasheet/rchip/PYu-RC_Group_51_RoHS_L_12.pdf, Construction=Rectangular, Contact Plating=Tin,Matte, Depth=0.8mm, Features="Moisture Resistant", Height=0.45mm, Lead Free="Lead Free", Length=1.6mm, Military Standard=Not, Number of Terminations=2, Packaging="Tape and Reel", Power Rating=100mW, Reach SVHC Compliant=No, RoHS Compliant=Yes, Series=RC, Technology="THICK FILM", Termination=SMD/SMT, Tolerance=1%
R201 R401 R402 R403 R404 R405 R409 R410 R411: library part CMP-009-00010-1, "SMD Chip Resistor, 10 kOhm, ± 1%, 100 mW, 0603 [1608 Metric], Thick Film, General Purpose", Case Code (Imperial)=0603, Case Code (Metric)=1608, Max Operating Temperature=155°C, Max Power Dissipation=100mW, Min Operating Temperature=-55°C, Resistance Tolerance=1%, Resistor Type="Thick Film", Temperature Coefficient=100ppm/°C, Voltage Rating=75V, Voltage Rating (DC)=50V, Case/Package=0603, ComponentLink1Description=Datasheet, ComponentLink1URL=https://www.yageo.com/upload/media/product/products/datasheet/rchip/PYu-RC_Group_51_RoHS_L_12.pdf, Construction=Rectangular, Depth=0.8mm, Features="Moisture Resistant", Height=0.45mm, Lead Free="Lead Free", Lead Pitch=0.3mm, Length=1.6mm, Military Standard=Not, Number of Terminations=2, Packaging="Tape and Reel", Pins=2, Power Rating=100mW, Reach SVHC Compliant=No, RoHS Compliant=Yes, Series=RC, Termination=SMD/SMT, Tolerance=1%, Weight=7.1E-05oz, Width=0.8mm
R203 R406 R407 R408 R412 R413 R414: library part CMP-009-00011-1, "SMD Chip Resistor, 33 kOhm, ± 1%, 100 mW, 0603 [1608 Metric], Thick Film, General Purpose", Case Code (Imperial)=0603, Case Code (Metric)=1608, Max Operating Temperature=155°C, Min Operating Temperature=-55°C, Power Rating=100mW, Temperature Coefficient=100ppm/°C, Tolerance=1%, Voltage Rating=50V, Case/Package=0603, ComponentLink1Description=Datasheet, ComponentLink1URL=https://www.yageo.com/upload/media/product/products/datasheet/rchip/PYu-RC_Group_51_RoHS_L_12.pdf, Contact Plating=Tin,Matte, Height=0.45mm, Length=1.6mm, Packaging="Tape and Reel", RoHS Compliant=Yes, Series=RC, Termination=SMD/SMT, Width=0.8mm
R301 R302 R303 R304 R305 R306: library part CMP-009-00004-12, "SMD Chip Resistor, 100 Ohm, ± 1%, 250 mW, 1206 [3216 Metric], Thick Film, General Purpose", Case Code (Imperial)=1206, Case Code (Metric)=3216, Max Operating Temperature=155°C, Max Power Dissipation=250mW, Min Operating Temperature=-55°C, Package Quantity=5000, Resistance Tolerance=1%, Resistor Type="Thick Film", Temperature Coefficient=100ppm/°C, Voltage Rating=200V, Case/Package=1206, ComponentLink1Description=Datasheet, ComponentLink1URL=https://www.yageo.com/upload/media/product/products/datasheet/rchip/PYu-RC_Group_51_RoHS_L_12.pdf, Depth=1.6mm, Features="Moisture Resistant", Height=0.55mm, Lead Free="Lead Free", Length=3.1mm, Number of Terminations=2, Packaging="Tape and Reel", Power Rating=250mW, Reach SVHC Compliant=Unknown, RoHS Compliant=Yes, Series=RC, Technology="THICK FILM", Termination=SMD/SMT, Tolerance=1%, Voltage Rating (AC)=200V, Width=1.6mm
SW201: library part CMP-011-00000-13, "Switch Tactile N.O. SPST Round Button Gull Wing 0.05A 12VDC 100000Cycles 0.98N SMD T/R", Max Operating Temperature=70°C, Min Operating Temperature=-20°C, Operating Force=100gf, Ratings=IP40, Actuator Type=Standard, ComponentLink1Description=Datasheet, ComponentLink1URL=https://www.ckswitches.com/media/2567/pts647.pdf, Illumination Type=Non-Illuminated, Mechanical Life=100000Cycles, Mounting Technology="Surface Mount", Number of Positions=2, Packaging="Cut Tape", Series=PTS647, Switch Function=Off-Mom, Switch Travel=0.25mm, Termination="Gull Wing", Throw Configuration=SPST
SW202: library part CMP-011-00001-10, "JS Series Sub-Miniature Slide Switch SPDT On-On Top Slide 0.3A 6VDC J-Lead Surface Mount T/R", Max Operating Temperature=85°C, Min Operating Temperature=-40°C, Voltage Rating (DC)=6V, Actuator Length=2mm, Actuator Material=Nylon,Polyamide,PA46, Actuator Type=Standard, ComponentLink1Description=Datasheet, ComponentLink1URL=https://www.ckswitches.com/media/1422/js.pdf, Contact Material="Copper Alloy", Contact Plating=Silver, Electrical Life=5000Cycles, Mounting Technology="Surface Mount", Packaging="Cut Tape", Series=JS, Switch Function=On-On, Switch Travel=2mm, Throw Configuration=SPDT
TP301 TP302 TP303 TP401 TP402 TP403: library part CMP-000000-5, "TEST POINT, PCB, THROUGH HOLE; Product R; Range: -; Connector Colour: Black; Mounting: Through Hole", Color=Black, Package Quantity=100, Body Material=Bronze, ComponentLink1Description=Datasheet, ComponentLink1URL=https://www.keyelco.com/userAssets/file/M65p56.pdf, Contact Material=Bronze, Contact Plating=Tin,Silver, Diameter=2.54mm, Hole Diameter=1.6mm, Housing Color=Black, Inside Diameter=1.27mm, Insulation=Insulated, Insulation Material=Nylon, Lead Free="Lead Free", Length=7.62mm, Material=Nylon,Bronze,Silver, Mounting Technology="Through Hole", Number of Contacts=1, Number of Ports=1, Orientation=Straight, Outside Diameter=2.54mm, Packaging=Bulk, Plating=Silver, Reach SVHC Compliant=No, RoHS Compliant=Yes, Series=THM, Termination="Through Hole"
U101: library part CMP-019-00004-17, "AP63203 Series 3.3 V 2 A SMT Fixed Low IQ Synchronous Buck - TSOT-26", Max Operating Temperature=85°C, Max Supply Voltage=32V, Min Operating Temperature=-40°C, Min Supply Voltage=3.8V, Nominal Supply Current=22uA, Output Current=2A, Output Voltage=3.3V, Switching Frequency=1.1MHz, ComponentLink1Description=Datasheet, ComponentLink1URL=https://www.diodes.com/assets/Datasheets/AP63200-AP63201-AP63203-AP63205.pdf, Height=1mm, Max Duty Cycle=100%, Number of Outputs=1
U102: library part CMP-019-00003-17, "AP63205 Series 32 V 2 A 1.1 MHz Synchronous Buck Converter -TSOT-26", Max Operating Temperature=85°C, Max Supply Voltage=32V, Min Operating Temperature=-40°C, Min Supply Voltage=3.8V, Nominal Supply Current=22uA, Output Current=2A, Output Voltage=5V, Switching Frequency=1.1MHz, ComponentLink1Description=Datasheet, ComponentLink1URL=https://www.diodes.com/assets/Datasheets/AP63200-AP63201-AP63203-AP63205.pdf, Height=1mm, Max Duty Cycle=100%, Number of Outputs=1
U201: library part CMP-020-00000-11, "MCU 32-bit STM32 ARM Cortex M4 RISC 512KB Flash 1.8V/2.5V/3.3V 64-Pin LQFP Tray", Case/Package=LQFP, Clock Frequency=84MHz, Max Operating Temperature=85°C, Max Power Dissipation=313mW, Max Supply Voltage=3.6V, Min Operating Temperature=-40°C, Min Supply Voltage=1.7V, Nominal Supply Current=1.8uA, Operating Supply Voltage=3.3V, Package Quantity=960, ComponentLink1Description=Datasheet, ComponentLink1URL=https://www.st.com/content/ccc/resource/technical/document/datasheet/30/91/86/2d/db/94/4a/d6/DM00102166.pdf/files/DM00102166.pdf/jcr:content/translations/en.DM00102166.pdf, Core Architecture=ARM, Data Bus Width=32b, Frequency=84MHz, Height=1.6mm, Interface=I2C,SPI,USB,IrDA,SDIO,UART,USART,LIN,I2S, Lead Free="Lead Free", Memory Format=FLASH, Memory Size=512KB, Number of A/D Converters=1, Number of ADC Channels=12, Number of Channels=16, Number of I2C Channels=3, Number of I/Os=50, Number of Programmable I/O=50, Number of PWM Channels=23, Number of SPI Channels=3, Number of Timers/Counters=8, Number of UART Channels=3, Number of USB Channels=1, Oscillator Type=Internal, Packaging=Tray, Peripherals="Brown-out Detect/Reset,POR,PWM,WDT,DMA", Pins=64, Radiation Hardening=No, RAM Size=96KB, Reach SVHC Compliant=No, RoHS Compliant=Yes, Series="STM32 F4", Watchdog Timer=Yes, Weight=0.012088oz
U301 U302 U303: library part CMP-024-00000-6, "600 V half-bridge gate driver IC with shoot through protection, SOIC 8N, RoHS", Case/Package=SOIC, Max Operating Temperature=150°C, Max Output current=360mA, Max Supply Voltage=20V, Min Operating Temperature=-40°C, Channel Type=Independent, ComponentLink1Description=Datasheet, ComponentLink1URL=https://www.infineon.com/dgdl/ir2103.pdf?fileId=5546d462533600a4015355c7b54b166f, Fall Time=60ns, Halogen Free="Not Halogen Free", Height=0.059inch, Lead Free="Lead Free", Length=0.196inch, Mounting Technology="Surface Mount", Number of Channels=2, Number of Drivers=2, Number of Outputs=2, Output Current=360mA, Packaging="Cut Tape", Pins=8, Propagation Delay=680ns, RoHS Compliant=Yes, Series=-, Width=0.157inch
U401: library part CMP-016-00000-9, "Precision quad differential comparator, commercial grade 14-TSSOP 0 to 70", Case/Package=TSSOP, Input Bias Current=250nA, Input Offset Voltage (Vos)=3mV, Max Dual Supply Voltage=15V, Max Operating Temperature=70°C, Max Supply Current=500uA, Max Supply Voltage=30V, Min Dual Supply Voltage=1V, Min Operating Temperature=0°C, Min Supply Voltage=2V, Output Current=20mA, Output Current per Channel=6mA, Package Quantity=2000, Quiescent Current=2.5mA, Supply Current=2mA, Voltage Gain=106.02dB, ComponentLink1Description=Datasheet, ComponentLink1URL=https://www.ti.com/lit/ds/symlink/lm339.pdf?HQS=dis-dk-null-digikeymode-dsf-pf-null-wwe&ts=1718677814239, Lead Free="Lead Free", Max Input Current=250nA, Mounting Technology="Surface Mount", Number of Channels=4, Number of Elements=4, Output Compatibility=CMOS, Output Type=TTL, Packaging="Tape and Reel", Pins=14, Radiation Hardening=No, Reach SVHC Compliant=No, Response Time=1.3us, RoHS Compliant=Yes, Series=-, Technology=BIPOLAR, Weight=0.002018oz
Y201: library part CMP-003-00000-10, "Crystal 24MHz ±10ppm (Tol) ±10ppm (Stability) 12pF FUND 50Ohm 4-Pin Mini-CSMD T/R", Case/Package="4-SMD, No Lead", Frequency=24MHz, Load Capacitance=12pF, Size="0.079\" L x 0.063\" W (2.00mm x 1.60mm)"

## Nets (pads, with @x,y where several pads share a name; then routed paths per layer and width w, separated by ;. In a path a pad name is that pad's centre, name@x,y a point inside that pad or via, vN(x,y) a via of type N, cw(c..) or ccw(c..) an arc to the next point about the centre after c; other vN are vias at no path point)
3V3_BUCK_BST: C102.2 U101.6
3V3_BUCK_EN: R101.1 R102.2 U101.2
3V3_BUCK_SW: C102.1 L101.1 U101.5
3V3_LED_K: D101.1 R103.2
4IN+: R404.2 U401.11
4IN-: R405.2 U401.10
5V_BUCK_BST: C106.2 U102.6
5V_BUCK_EN: R104.1 R105.2 U102.2
5V_BUCK_SW: C106.1 L102.1 U102.5
5V_LED_K: D102.1 R106.2
+3V3: C103.2 C104.2 C201.2 C202.2 C203.2 C204.2 C205.2 C206.2 C207.2 C208.2 D101.2 J202.2 L101.2 SW202.3 U101.1 U201.1 U201.13 U201.19 U201.32 U201.48 U201.64